# Altium PCB MSXII_Fan_Control.PcbDoc
Units mm, origin at the board's own origin, x right, y up, seen from the top; angles counter-clockwise.
Board outline 25 x 23 mm, 2 copper layers (Top Layer, Bottom Layer); 8 components, 6 nets, 30 pads, 3 vias.
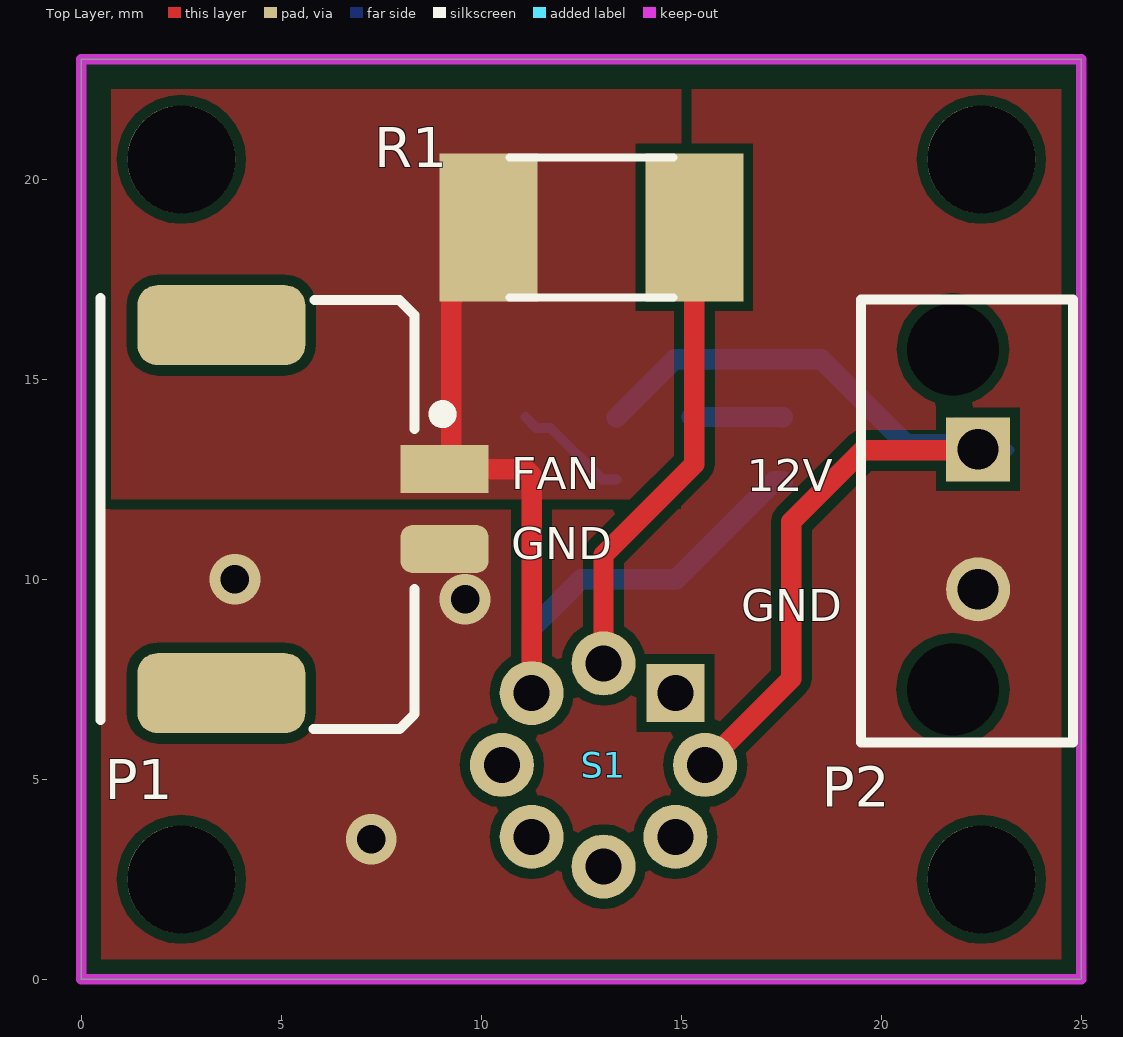
[diagram p0: Top Layer view]
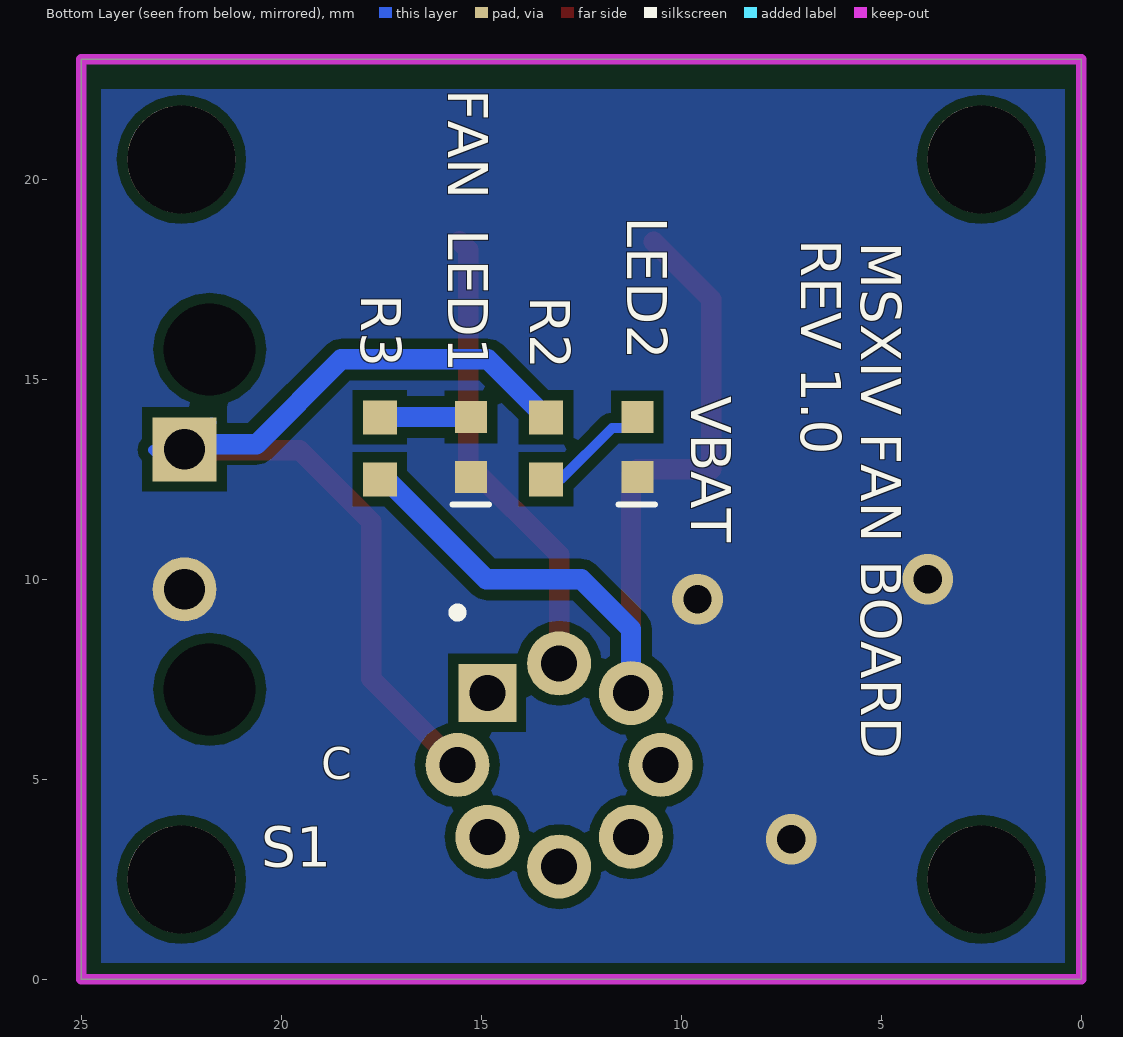
[diagram p1: Bottom Layer view, seen from below]
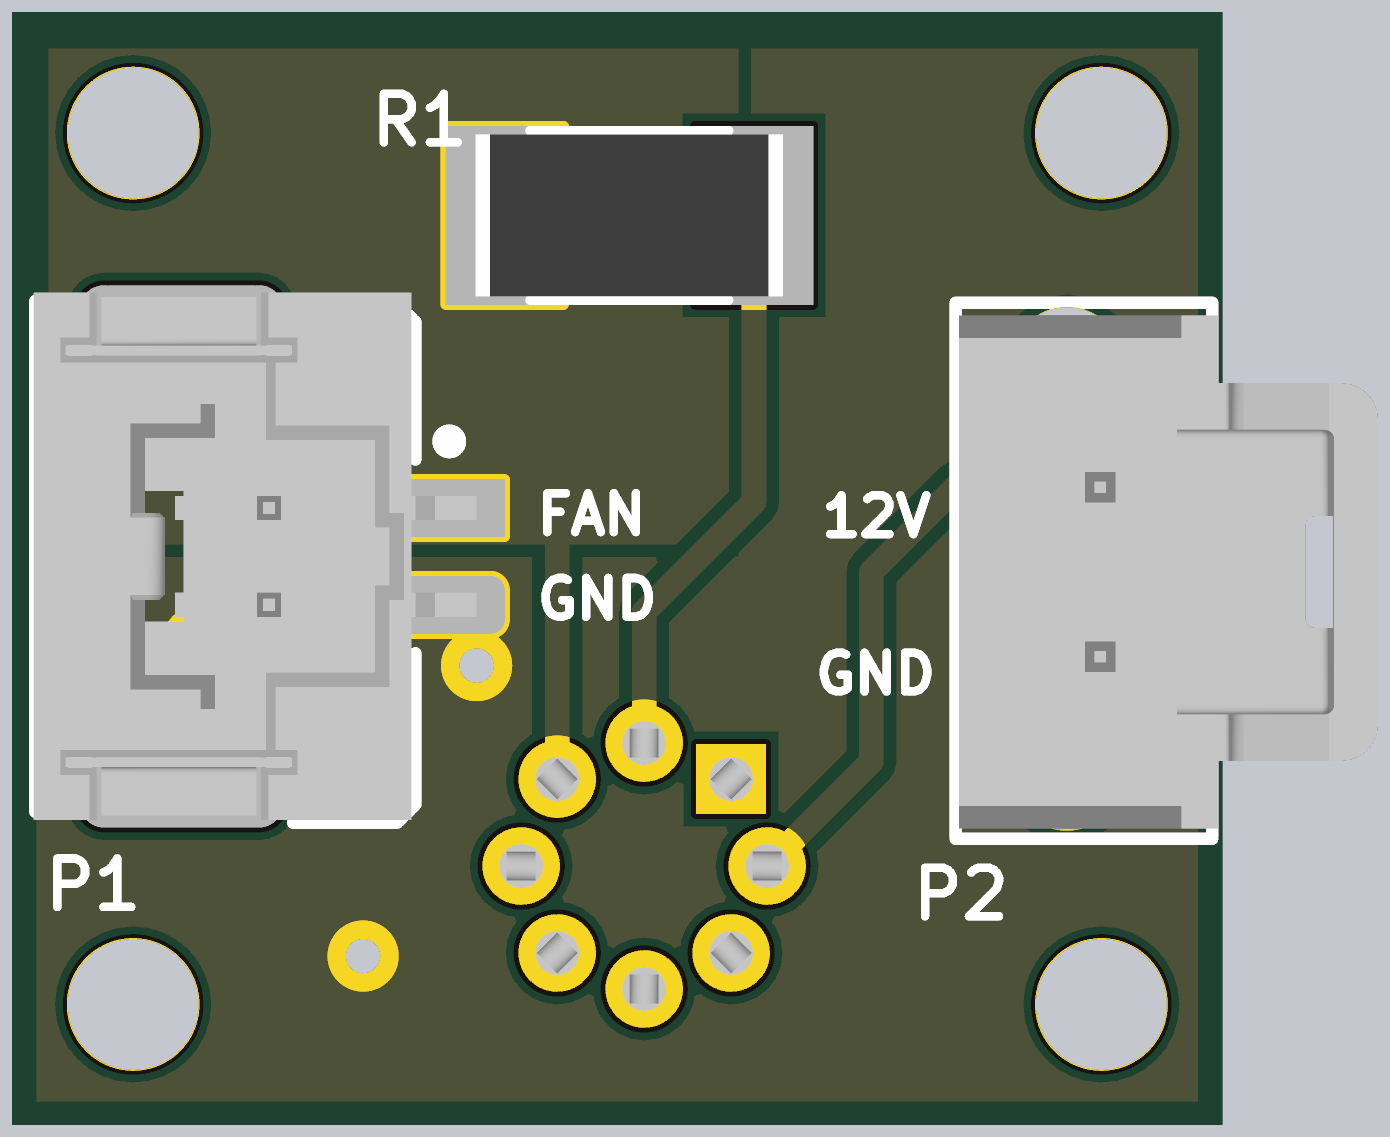
[diagram p2: 3D render of the assembled board from above, using the file's embedded part models]
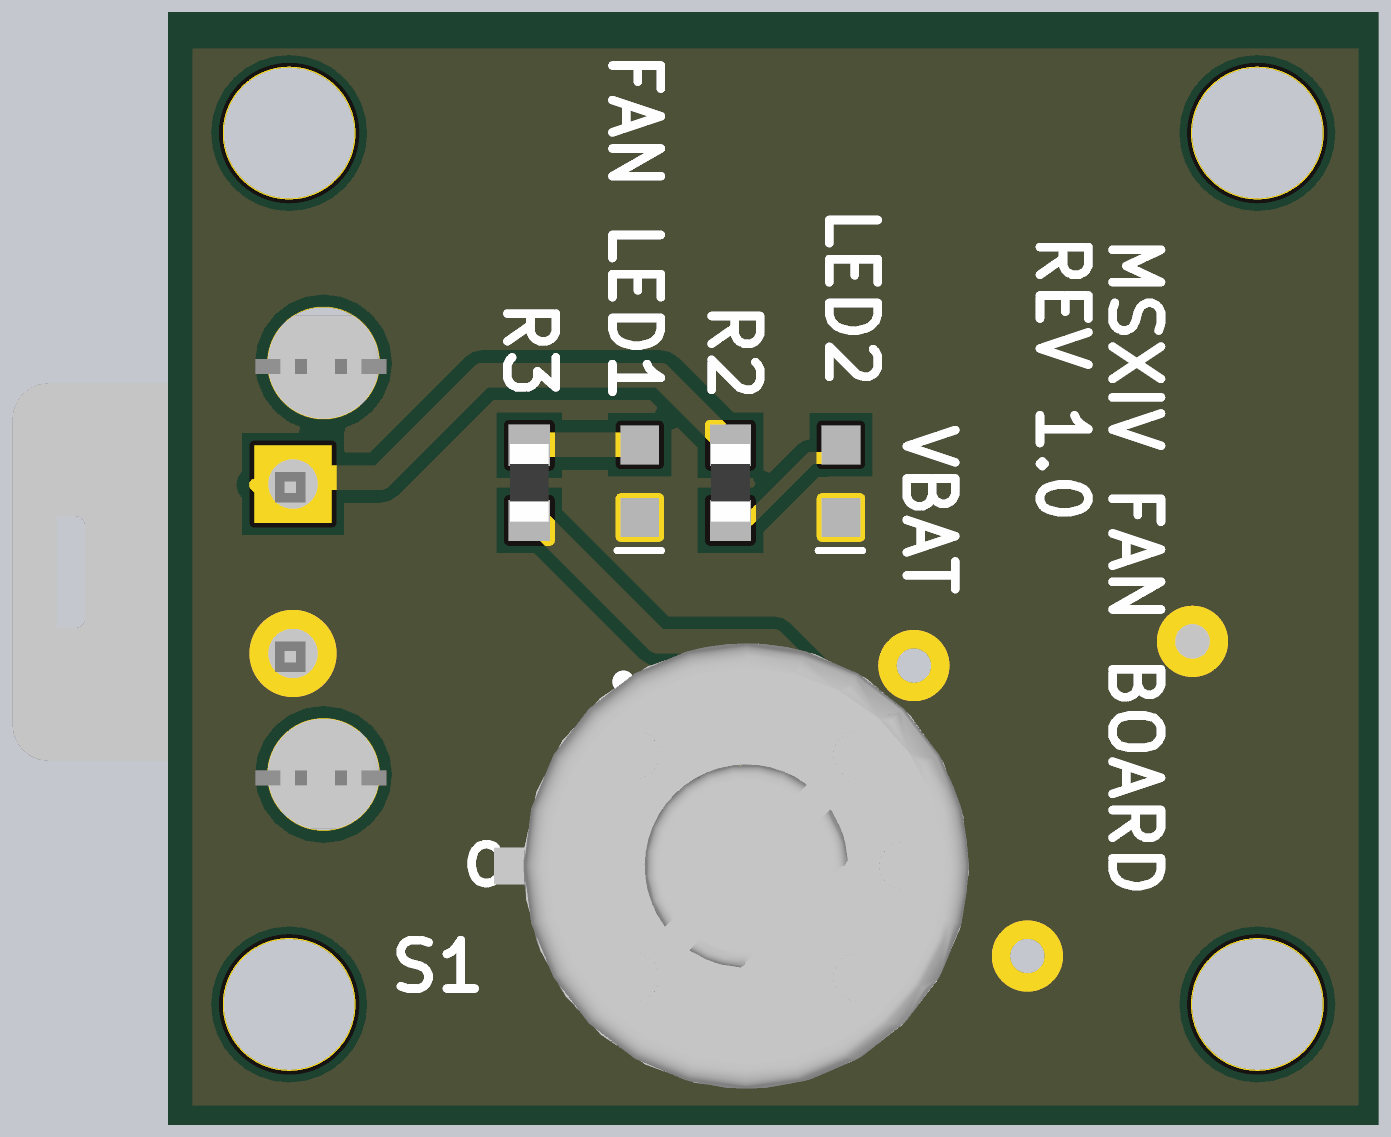
[diagram p3: 3D render of the assembled board from below, using the file's embedded part models]

## Layer stack, top to bottom
Top Solder: solder mask 0.0102, Solder Resist, Dk 3.5
Top Layer: signal copper 0.0356
Dielectric 1: dielectric 0.32, FR-4, Dk 4.8
Bottom Layer: signal copper 0.0356
Bottom Solder: solder mask 0.0102, Solder Resist, Dk 3.5

## Board outline
0,0 25,0 25,23 0,23

## Design rules (kind name [scope] priority, off if disabled: settings)
Clearance [All] p1: gap=0.254 ignorepadtopadclearanceinfootprint=FALSE except(0: Arc-Hole Track-Hole SMDPad-Hole THPad-Hole Via-Hole Fill-Hole Poly-Hole Region-Hole Text-Hole)
PlaneConnect [All] p1: planeconnectstyle=Direct reliefexpansion=0.508 reliefentries=4 reliefconductorwidth=0.254 reliefairgap=0.254
PolygonConnect [All] p1: connectstyle=Direct reliefconductorwidth=0.254 reliefentries=4 polygonreliefangle="90 Angle" airgapwidth=0.254
RoutingVias [All] p1: holewidth=0.711 width=1.27 viastyle="Through Hole" minholewidth=0.711 minwidth=1.27 maxholewidth=0.711 maxwidth=1.27
SolderMaskExpansion [All] p1: expansion=0.102
Width [All] p1: maxlimit=2 minlimit=0.254 preferedwidth=0.254
29 further rules are at their usual default settings.

## Classes and differential pairs
component class Fan_Board: LED1 P1 P2 R1 R2 R3 S1

## Components (designator, comment, footprint, x,y, rotation, side; value= is the part's Value field where it differs from the comment)
LED1 "LED RED CLEAR 2V 0603" LED_0603 15.265,14.009 r270 bottom
LED2 "LED GREEN CLEAR 2V 0603" LED_0603 11.111,14.009 r270 bottom
P1 "Dura-Clik" "CONN, 2POS Dura-Click Vertical" 9.08,12.755 r270 top
P2 "CONN 2POS ULTRA-FIT 0.138\"" "CONN, 2POS ULTRA-FIT" 22.42,13.25 r270 top
R1 "RES 82 OHM 5% 1W 2512" RES2512 12.75,18.8 r0 top
R2 "RES 10K OHM 1% 1/10W 0603" "RES, 0603" 13.385,13.275 r270 bottom
R3 "RES 10K OHM 1% 1/10W 0603" "RES, 0603" 17.539,13.275 r90 bottom
S1 "SP3T" "SW ROT RM SERIES" 13.056,5.359 r90 top

## Footprints (in the part's own frame and the unit in brackets; to place one, negate y for a bottom-side part, rotate by r counter-clockwise, add the part's x,y. Pads: shape width x height; smd on the part's side, far side on the other; paste and mask are expansions set on the pad)
"CONN, 2POS Dura-Click Vertical" [mm] "WM7169CT-ND"
  rect 1.2x2.2 smd: 1(0,0)
  rrect50% 1.2x2.2 smd: 2(2,0)
  rrect50% 2x4.2 smd: 3(-3.6,-5.58) 3(5.6,-5.58)
  silkscreen extent -4.28,-8.6 6.5,0.05, body extent -4.45,-8.63 6.45,0.52, height 8
"CONN, 2POS ULTRA-FIT" [mm] "2 Positions Header, Shrouded Connector 0.138\" (3.50mm) Through Hole Gold"
  rect 1.6x1.6 hole 1.02: 1(0,0)
  round 1.6 hole 1.02: 2(3.5,0)
  round 1.6 hole 2.3: ""(-2.5,-0.63) ""(6,-0.63)
  silkscreen extent -3.74,-2.93 7.33,2.37, body extent -3.48,-2.87 7.12,5.79, height 13.85
LED_0603 [mm]
  rect 0.8x0.8 smd: 1(-0.05,0.01) 2(1.45,0.01)
  silkscreen extent 2.13,-0.46 2.13,0.45, body extent -0.09,-0.39 1.51,0.41, height 0.8
RES2512 [mm]
  rect 2.45x3.7 smd: 1(-2.575,0) 2(2.575,0)
  silkscreen extent -2.05,-1.75 2.05,1.75, body extent -3.18,-1.68 3.17,1.68, height 0.65
"RES, 0603" [mm] "Chip Resistor, 2-Leads, Body 1.60x0.80mm, IPC Medium Density"
  rect 0.85x0.85 smd: 1(-0.775,0) 2(0.775,0)
  body extent -0.8,-0.4 0.8,0.4, height 0.55
"SW ROT RM SERIES" [mm]
  rect 1.45x1.45 hole 0.9: 1(1.796,-1.796)
  round 1.6 hole 0.9: 2(2.54,0) 3(1.796,1.796) 4(0,2.54) 5(-1.796,1.796) 6(-2.54,0) 7(-1.796,-1.796) C(0,-2.54)
  body extent -4.6,-5.21 4.6,4.6, height 14.73

## Part data
LED1: "Red 631nm LED Indication - Discrete 2V 0603 (1608 Metric)", Color=Red, Current - Test=20mA, Lens Color=Colorless, Manufacturer="Wurth Electronics Inc.", Manufacturer Part Number=150060RS75000, Millicandela Rating=250mcd, Package / Case="0603 (1608 Metric)", Supplier Device Package=0603, Supplier Part Number 1=732-4978-1-ND, Voltage - Forward (Vf) (Typ)=2V, Category=Optoelectronics, ComponentLink1Description=http://katalog.we-online.de/led/datasheet/150060RS75000.pdf, ComponentLink1URL=http://katalog.we-online.de/led/datasheet/150060RS75000.pdf, Features=-, Height (Max)=0.80mm, Lens Style/Size="Rectangle with Flat Top, 1.10mm x 0.70mm", Lens Transparency=Clear, Mounting Type="Surface Mount", Packaging="Cut Tape (CT)", Part Status=Active, Pricing 1="1=0.21, 100=0.1617, 500=0.13964 (CAD)", RoHS="RoHS Compliant", Size / Dimension="1.60mm L x 0.80mm W", Stock 1=35521, Supplier 1=Digi-Key, Viewing Angle=140°, Wavelength - Dominant=625nm, Wavelength - Peak=630nm
LED2: "Green 572nm LED Indication - Discrete 2V 0603 (1608 Metric)", Color=Green, Current - Test=20mA, Lens Color=Colorless, Manufacturer="Wurth Electronics Inc.", Manufacturer Part Number=150060VS75000, Millicandela Rating=40mcd, Package / Case="0603 (1608 Metric)", Supplier Device Package=0603, Supplier Part Number 1=732-4980-1-ND, Voltage - Forward (Vf) (Typ)=2V, Category=Optoelectronics, ComponentLink1Description=http://katalog.we-online.de/led/datasheet/150060VS75000.pdf, ComponentLink1URL=http://katalog.we-online.de/led/datasheet/150060VS75000.pdf, Features=-, Height (Max)=0.80mm, Lens Style/Size="Rectangle with Flat Top, 1.10mm x 0.70mm", Lens Transparency=Clear, Mounting Type="Surface Mount", Packaging="Cut Tape (CT)", Part Status=Active, Pricing 1="1=0.21, 100=0.1617, 500=0.13964 (CAD)", RoHS="RoHS Compliant", Size / Dimension="1.60mm L x 0.80mm W", Stock 1=9408, Supplier 1=Digi-Key, Viewing Angle=140°, Wavelength - Dominant=570nm, Wavelength - Peak=572nm
P1: library part "CONN 2POS DURA-CLIK 0.079\" VERT", "2 Positions Header, Shrouded Connector 0.079\" (2.00mm) Surface Mount, Vertical Tin", Current Rating=-, Insulation Color=Natural, Manufacturer="Molex, LLC", Manufacturer Part Number=5600200220, Supplier Part Number 1=WM10862CT-ND, Applications="Automotive, Industrial", Category="Connectors, Interconnects", ComponentLink1Description=http://www.molex.com/pdm_docs/sd/5600200220_sd.pdf, ComponentLink1URL=http://www.molex.com/pdm_docs/sd/5600200220_sd.pdf, Connector Type=Header, Contact Finish - Mating=Tin, Contact Finish - Post=Tin, Contact Finish Thickness - Mating=-, Contact Finish Thickness - Post=-, Contact Length - Mating=-, Contact Length - Post=-, Contact Material="Copper Alloy", Contact Shape=Square, Contact Type="Male Pin", Fastening Type="Latch Lock", Features="Solder Retention", Ingress Protection=-, Insulation Height="0.315\" (8.00mm)", Insulation Material="Polyamide (PA), Nylon", Mated Stacking Heights=9.3mm, Material Flammability Rating=-, Mounting Type="Surface Mount", Number of Positions=2, Number of Positions Loaded=All, Number of Rows=1, Operating Temperature=-, Overall Contact Length=-, Packaging="Cut Tape (CT)", Part Status=Active, Pitch - Mating="0.079\" (2.00mm)", Pricing 1="1=1.16, 10=1.012, 25=0.952, 50=0.9122, 100=0.8727, 250=0.79336 (CAD)", RoHS="RoHS Compliant", Row Spacing - Mating=-, Shrouding="Shrouded - 4 Wall", Stock 1=11912, Style="Board to Cable/Wire", Supplier 1=Digi-Key, Termination=Solder, Voltage Rating=-
P2: "2 Positions Header, Shrouded Connector 0.138\" (3.50mm) Through Hole Gold", Current Rating=-, Insulation Color=Black, Manufacturer 1="Molex, LLC", Manufacturer Part Number 1=1722861302, Material Flammability Rating="UL94 V-0", Operating Temperature="-40°C ~ 120°C", Supplier Part Number 1=WM11673-ND, Voltage=400V, ComponentLink1Description=http://www.molex.com/pdm_docs/sd/1722861302_sd.pdf, ComponentLink1URL=http://www.molex.com/pdm_docs/sd/1722861302_sd.pdf, Connector Type=Header, Contact Finish - Mating=Gold, Contact Finish - Post=Tin, Contact Finish Thickness - Mating="30µin (0.76µm)", Contact Finish Thickness - Post="60µin (1.52µm)", Contact Length - Mating=-, Contact Length - Post="0.126\" (3.20mm)", Contact Material="Copper Alloy", Contact Shape=Square, Contact Type="Male Pin", Fastening Type="Latch Holder", Ingress Protection=-, Insulation Height="0.465\" (11.80mm)", Insulation Material="Liquid Crystal Polymer (LCP)", Mated Stacking Heights=26.99mm, Mounting Type="Through Hole", Number of Positions=2, Number of Positions Loaded=All, Number of Rows=1, Overall Contact Length=-, Packaging=Tray, Part Status=Active, Pitch - Mating="0.138\" (3.50mm)", Row Spacing - Mating=-, Series=UltraFit, Shrouding="Shrouded - 4 Wall", Style="Board to Board or Cable", Supplier 1=Digi-Key, Termination="Kinked Pin, Solder"
R1: Case/Package=0805, Case Code (Metric)=2012, Manufacturer=Panasonic, Manufacturer Part Number=ERJ-P06J820V, Max Operating Temperature=155°C, Max Power Dissipation=500mW, Min Operating Temperature=-55°C, Package Quantity=1, Resistance=82R, Supplier Part Number 1=RMCF2512JT82R0CT-ND, Temperature Coefficient=200ppm/°C, Tolerance=5%, Voltage Rating=150V, Case Code (Imperial)=0805, ComponentLink1Description=https://datasheet.ciiva.com/24043/aoa0000ce4-64075-24043253.pdf?src-supplier=Mouser, ComponentLink1URL=https://datasheet.ciiva.com/24043/aoa0000ce4-64075-24043253.pdf?src-supplier=Mouser, ComponentLink2Description=https://datasheet.ciiva.com/30128/aoa0000ce4-30128246.pdf?src-supplier=Onlinecomponents.com, ComponentLink2URL=https://datasheet.ciiva.com/30128/aoa0000ce4-30128246.pdf?src-supplier=Onlinecomponents.com, ComponentLink3Description=https://datasheet.ciiva.com/9187/aoa0000ce4-9187530.pdf?src-supplier=Avnet, ComponentLink3URL=https://datasheet.ciiva.com/9187/aoa0000ce4-9187530.pdf?src-supplier=Avnet, ComponentLink4Description=http://components.arrow.com/part/dataview/46840453S9826188N1174?src-supplier=Arrow, ComponentLink4URL=http://components.arrow.com/part/dataview/46840453S9826188N1174?src-supplier=Arrow, ComponentLink5Description=https://www.verical.com/server-webapp/html/getDatasheet?partID=363751&src-supplier=Verical, ComponentLink5URL=https://www.verical.com/server-webapp/html/getDatasheet?partID=363751&src-supplier=Verical, ComponentLink6Description=https://www.seielect.com/Catalog/SEI-RMCF_RMCP.pdf?src-supplier=Digi-Key, ComponentLink6URL=https://www.seielect.com/Catalog/SEI-RMCF_RMCP.pdf?src-supplier=Digi-Key, ComponentLink7Description=https://www.seielect.com/catalog/SEI-RMCF_RMCP.pdf?src-supplier=Avnet, ComponentLink7URL=https://www.seielect.com/catalog/SEI-RMCF_RMCP.pdf?src-supplier=Avnet, ComponentLink8Description=http://www.seielect.com/Catalog/SEI-RMCF_RMCP.pdf?src-supplier=Future+Electronics, ComponentLink8URL=http://www.seielect.com/Catalog/SEI-RMCF_RMCP.pdf?src-supplier=Future+Electronics, Composition="Thick Film", Contact Plating=Tin, Depth=3.2mm, Features="Automotive AEC-Q200", Height=0.028inch, Lead Free="Lead Free", Length=0.079inch, Military Standard=Not, Mount="Surface Mount", Number of Terminations=2, Packaging="Tape and Reel", Power Rating=500mW, Pricing 1="1 = 0.30000, 10 = 0.25400, 100 = 0.09930, 1000 = 0.04158 (USD)", Radiation Hardening=No, RoHS=Yes, Stock 1=18769, Supplier 1=Digi-Key, Voltage Rating (DC)=150V, Width=1.2mm
R2 R3: "RES SMD 10K OHM 1% 1/10W 0603", Manufacturer 1=Yageo, Manufacturer Part Number 1=RC0603FR-0710KL, Operating Temperature="-55°C ~ 155°C", Package / Case="0603 (1608 Metric)", Power=1/10W, Resistance=10k, Supplier Device Package=0603, Supplier Part Number 1=311-10.0KHRCT-ND, Temperature Coefficient=±100ppm/°C, Tolerance=±1%, ComponentLink1Description=http://www.yageo.com/documents/recent/PYu-RC_Group_51_RoHS_L_7.pdf, ComponentLink1URL=http://www.yageo.com/documents/recent/PYu-RC_Group_51_RoHS_L_7.pdf, Composition="Thick Film", Failure Rate=-, Height - Seated (Max)="0.022\" (0.55mm)", Packaging="Cut Tape (CT)", Part Status=Active, Size / Dimension="0.063\" L x 0.031\" W (1.60mm x 0.80mm)", Supplier 1=Digi-Key
S1: library part "SW ROT SP3T-NO 0.5A 24VDC", "SWITCH ROTARY 3POS 500MA 24V", Manufacturer="ITT C&K", Manufacturer Part Number=RM103772BCB, Supplier Part Number 1=CKN10697-ND, Pricing 1="1 = 2.27000, 10 = 2.17400, 25 = 1.98520, 50 = 1.89080, 100 = 1.70160, 250 = 1.55984, 500 = 1.51258, 1000 = 1.46531, 5000 = 1.37077 (USD)", Stock 1=22, Supplier 1=Digi-Key

## Free pads (board coordinates)
  round 2.7 hole 2.7: ""(2.5,2.5) ""(2.5,20.5) ""(22.5,2.5) ""(22.5,20.5)

## Via types
v1: diameter 1.27, hole 0.711, Top Layer to Bottom Layer, 3 vias

## Nets (pads, with @x,y where several pads share a name; then routed paths per layer and width w, separated by ;. In a path a pad name is that pad's centre, name@x,y a point inside that pad or via, vN(x,y) a via of type N, cw(c..) or ccw(c..) an arc to the next point about the centre after c; other vN are vias at no path point)
+12V: P2.1 R2.1 S1.C | length 25.2
  Top Layer w0.508: S1.C@15.541,5.573 S1.C@15.809,5.573 ; S1.C S1.C@15.809,5.573 ; P2.1@22.42,13.225 19.536,13.225 17.75,11.439 17.75,7.514 S1.C@15.809,5.573
  Bottom Layer w0.254: P2.1@21.747,13.923 22.29,13.38 P2.1 ; P2.1@22.42,12.793 22.59,12.623 P2.1@23.203,13.236
  Bottom Layer w0.508: R2.1 14.835,15.5 18.5,15.5 20.62,13.38 22.29,13.38 P2.1@22.42,13.38
FAN_1: P1.1 R1.1 R3.1 S1.3 | length 23.6
  Top Layer w0.508: R1.1@10.693,18.443 9.25,17 9.25,12.75 11.107,12.75 11.26,12.597 S1.3 11.21,7.155 11.25,7.136 11.27,7.127 S1.3@11.564,7.232
  Bottom Layer w0.508: S1.3 11.26,8.76 12.5,10 14.877,10 17.327,12.45 R3.1@17.539,12.45
FANLED_1: LED1.1 R3.2 | length 2.3
  Bottom Layer w0.508: LED1.1 17.53,14.059 R3.2
GND: LED1.2 LED2.2 P1.2 P2.2
  other v1: 7.25,3.5 9.595,9.5 3.84,10
NetR1_2: R1.2 S1.2 | length 11.6
  Top Layer w0.508: S1.2 13.056,10.611 15.325,12.88 15.325,18.236 R1.2@15.544,18.456
"Power LED_1": LED2.1 R2.2 | length 2.9
  Bottom Layer w0.25: LED2.1 11.374,13.786 11.729,13.786 13.015,12.5 R2.2
pads on no net: P1.3 P2. S1.1 S1.4 S1.5 S1.6 S1.7

## Polygon pours and split planes (outlines as drawn)
GND on Bottom Layer "Bottom Layer-GND" (solid, pour order 24): 0.414,0.414 24.5,0.414 24.5,22.25 0.414,22.25
no net on Bottom Layer "Bottom Layer-No Net 1" (solid, pour order 20): -0.586,18.458
no net on Bottom Layer "Bottom Layer-No Net 3" (solid, pour order 16): 3.6,18.8
no net on Bottom Layer "Bottom Layer-No Net" (solid, pour order 4): 4.968,16.974
no net on Bottom Layer "Bottom Layer-No Net 2" (solid, pour order 0): 16,18.5
GND on Top Layer "Top Layer-GND" (solid, pour order 38): 27.25,18.5
GND on Top Layer "Top Layer-GND 1" (solid, pour order 36): 0.5,0.5 0.5,11.75 15,11.75 15,22.25 24.5,22.25 24.5,0.5
FAN_1 on Top Layer "Top Layer-FAN_1" (solid, pour order 34): 0.75,22.25 15,22.25 15,12 0.75,12
no net on Top Layer "Top Layer-No Net" (solid, pour order 30): 1.75,20
no net on Top Layer "Top Layer-No Net 1" (solid, pour order 28): 1.75,20.75

## Keep-outs
Keep-Out Layer:
  the board outline again, w0.254

## Silkscreen, mask and mechanical layers (free items; w line width, h text height)
Top Overlay:
  text "FAN" at 10.75,12.25 h0.8
  text "12V" at 16.633,12.207 h0.8
  text "GND" at 10.75,10.5 h0.8
  text "GND" at 16.5,8.957 h0.8
Bottom Overlay:
  text "FAN" at 15.831,22.25 h1 r90
  text "REV 1.0" at 7,18.5 h1 r90
  text "MSXIV FAN BOARD" at 5.5,18.443 h1 r90
  text "VBAT" at 9.75,14.577 h1 r90
  text "C" at 19,5 h0.8